# EAGLE board wara (EAGLE 7.5.0)
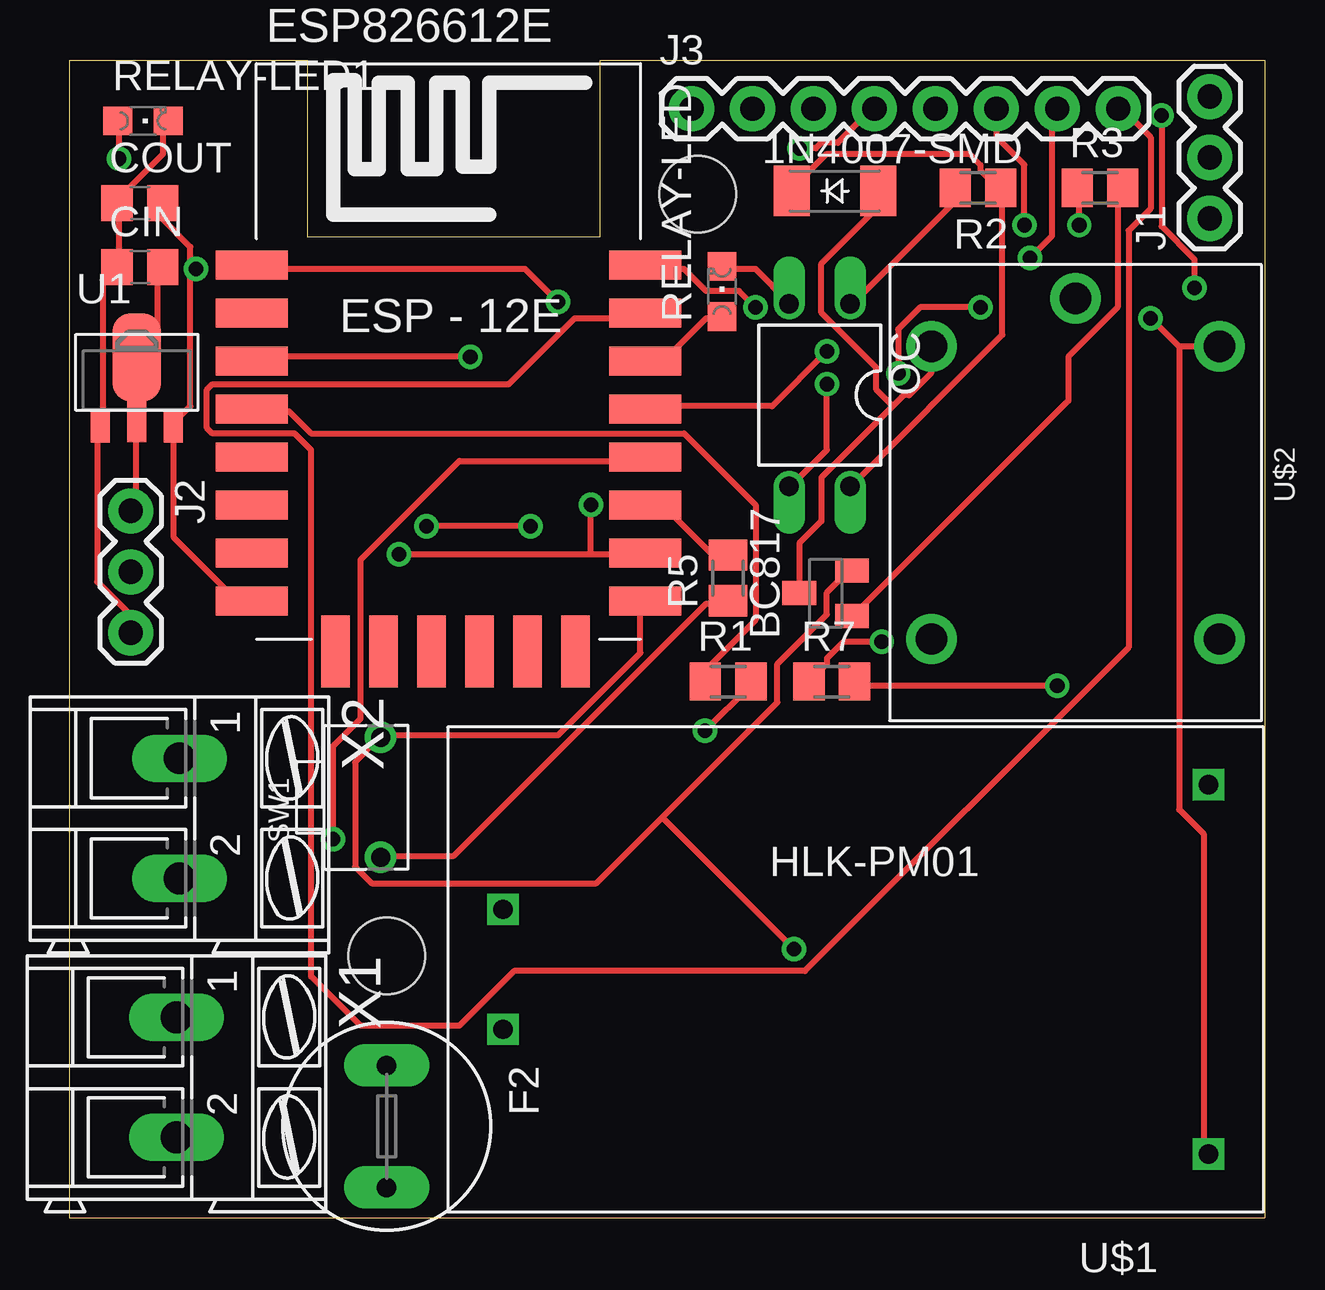
[diagram p0: board, top side]
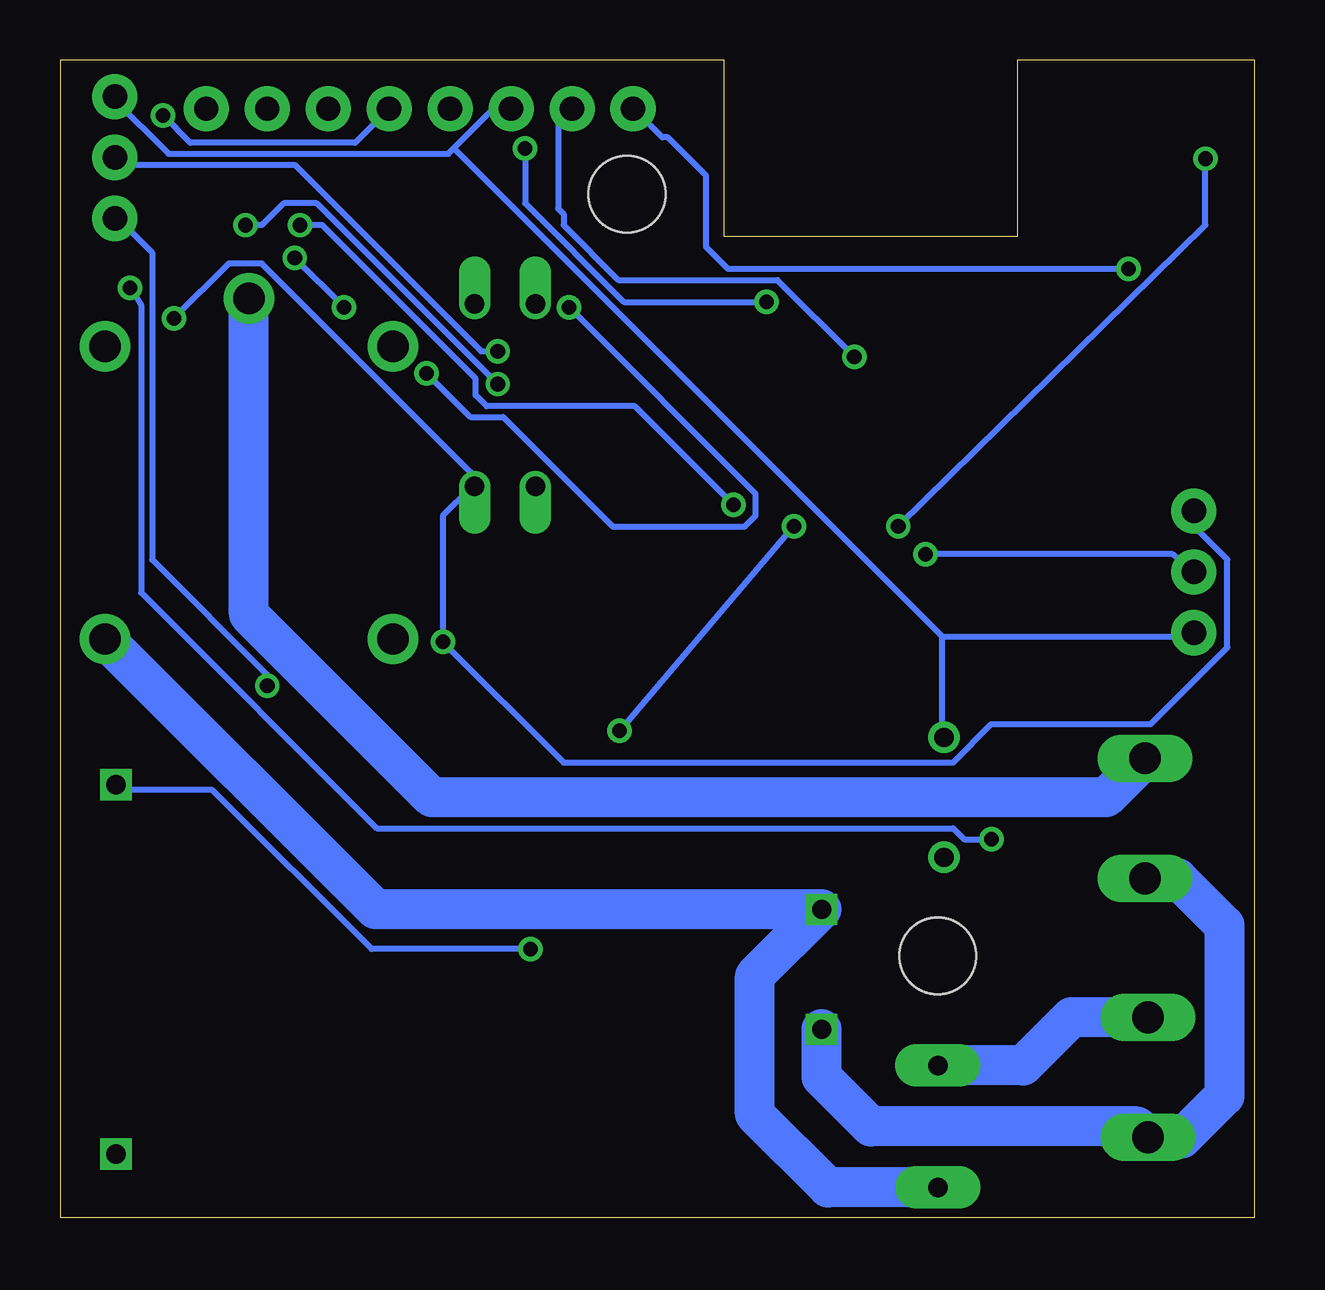
[diagram p1: board, bottom side, seen from below]

Size 49.78 x 48.26 mm. Coordinates in mm from the lower left corner, seen from the top.
Outline: 0,0 49.78,0 49.78,48.26 22.1,48.26 22.1,40.89 9.91,40.89 9.91,48.26 0,48.26 0,0
Copper layers (1*16): Top 0.035mm / dielectric 1.5mm / Bottom 0.035mm
Design rules "default": minimum track width 10mil, minimum drill 24mil, track to track 8mil, track to pad 8mil, pad to pad 8mil, via to via 8mil, smd to smd 8mil, copper to edge 40mil, drill to drill 8mil, minimum pad ring 10mil, minimum via ring 8mil, stop-mask expansion 4mil, vias tented up to drill 0mil, thermal gap 10mil
Holes 3.2 mm at 13.21,10.92 26.16,42.67

## Footprints (pad centres in the part's own frame; a part is rotated, then mirrored left to right if it is on the bottom)
SOD-123_MINI-SMA = smd 1.5 x 2.1: A 1.8,0; C -1.8,0
SOT23-BEC = smd 1 x 1.4: B -0.95,-1.1; C 0,1.1; E 0.95,-1.1
C0805 = smd 1.3 x 1.5: 1 -0.95,0; 2 0.95,0
ESP12E-SMD = smd 3 x 1.2: ADC -8.3,3.8; CH_PD -8.3,1.8; GND 8.1,-8.2; GPIO0 8.1,-2.2; GPIO2 8.1,-4.2; GPIO4 8.1,-0.2; GPIO5 8.1,1.8; GPIO12 -8.3,-4.2; GPIO13 -8.3,-6.2; GPIO14 -8.3,-2.2; GPIO15 8.1,-6.2; GPIO16 -8.3,-0.2; RESET -8.3,5.8; RXD0 8.1,3.8; TXD0 8.1,5.8; VCC -8.3,-8.2 | smd 1.2 x 3: CS0 -4.8,-10.3; GPIO9 -0.8,-10.3; GPIO10 1.2,-10.3; MISO -2.8,-10.3; MOSI 3.2,-10.3; SCLK 5.2,-10.3
TR5 = drill 0.813 pad 1.778 long: 1 -2.54,0; 2 2.54,0
1X03 = drill 1.016 pad 1.88: 1 0,0; 2 2.54,0; 3 5.08,0
1X08_ROUND = drill 1.016 pad 1.88: 1 0,0; 2 2.54,0; 3 5.08,0; 4 7.62,0; 5 10.16,0; 6 12.7,0; 7 15.24,0; 8 17.78,0
DIL04 = drill 0.813 offset: 1 -1.27,-3.81; 2 1.27,-3.81; 3 1.27,3.81; 4 -1.27,3.81
M0805 = smd 1.3 x 1.6: 1 -0.95,0; 2 0.95,0
CHIPLED_0805 = smd 1.2 x 1.2: A 0,-1.05; C 0,1.05
SW2-5.0-6.0X3.0X4.3MM = drill 0.8 pad 1.27: 1 -2.5,0; 2 2.5,0
SOT89 = smd 0.8 x 1.4: 1 -1.524,-1.905; 3 1.524,-1.905 | smd 0.8 x 1.9: 2 0,-1.651 | smd 2.032 x 3.65: 4 0,0.94
HLK-PM01 = drill 0.8 square: +5V 15.19,-7.76; AC1 -14.21,2.44; AC2 -14.21,-2.56; GND 15.19,7.64
RELAY-SONGLE = drill 1.3 pad 2.1: COM -8.1,0; NC 6.1,6; NO 6.1,-6; V+ -6.1,6; V- -6.1,-6
AK300/2 = drill 1.321 long: 1 -2.515,0; 2 2.489,0

## Placement (x,y rotation side)
1N4007-SMD  CGRM4007-G  [SOD-123_MINI-SMA]  31.88,42.8 0 top
BC817  SOT23  [SOT23-BEC]  31.5,26.04 90 top
CIN  1uF  [C0805]  2.92,39.62 0 top
COUT  1uF  [C0805]  2.92,42.29 0 top
ESP826612E  Value  [ESP12E-SMD]  15.88,33.91 0 top
F2  [TR5]  13.21,3.81 270 top
J1  [1X03]  47.5,41.66 90 top
J2  [1X03]  2.54,29.46 270 top
J3  [1X08_ROUND]  25.91,46.23 0 top
OC  PC817  [DIL04]  31.24,34.29 180 top
R1  230  [M0805]  27.43,22.35 0 top
R2  1k  [M0805]  37.85,42.93 180 top
R3  470  [M0805]  42.93,42.93 0 top
R5  470  [M0805]  27.43,26.67 90 top
R7  230  [M0805]  31.75,22.35 0 top
RELAY-LED  [CHIPLED_0805]  27.18,38.61 0 top
RELAY-LED1  ESP-LED  [CHIPLED_0805]  3.05,45.72 270 top
SW1  [SW2-5.0-6.0X3.0X4.3MM]  12.95,17.53 90 top
U1  XC6206PR  [SOT89]  2.79,34.92 0 top
U$1  HLK-PM01  [HLK-PM01]  32.26,10.41 0 top
U$2  RELAY-SONGLE  [RELAY-SONGLE]  41.91,30.23 270 top
X1  220V  [AK300/2]  4.45,5.84 270 top
X2  Plug  [AK300/2]  4.57,16.64 270 top

## Library data of the parts
1N4007-SMD = diode
BC817 = transistor-neu-to92
CIN COUT R1-R3 R5 R7 = rcl
ESP826612E = esp8266modules
F2 = fuse; OC_FARNELL: unknown; OC_NEWARK: unknown
J1 J2 = SparkFun-Connectors
J3 = SparkFun-Connectors; PROD_ID: CONN-08437
OC = optocoupler; MPN: PC817X4J000F; OC_FARNELL: 9707727; OC_NEWARK: 97K7059
RELAY-LED RELAY-LED1 = led
SW1 = Seeed-OPL-Switch
U1 = IC
U$1 = HLK-PM01
U$2 = Seeed-OPL-Relay
X1 X2 = con-ptr500; OC_FARNELL: unknown; OC_NEWARK: unknown

## Nets
+5V: 1N4007-SMD.C CIN.2 J2.1 OC.4 R2.1 R7.1 U1.2 U1.4 U$1.+5V U$2.V+
EN: ESP826612E.CH_PD J3.2
GND: BC817.E CIN.1 COUT.1 ESP826612E.GND J1.3 J2.3 J3.3 RELAY-LED1.C SW1.2 U1.1 U$1.GND
GPIO0: ESP826612E.GPIO0 J3.5
GPIO2: ESP826612E.GPIO2 R5.2
GPIO4: ESP826612E.GPIO4 J1.2
GPIO5: ESP826612E.GPIO5 RELAY-LED.A
GPIO12: ESP826612E.GPIO12
GPIO13: ESP826612E.GPIO13
GPIO14: ESP826612E.GPIO14
GPIO15: ESP826612E.GPIO15 J2.2 J3.6
GPIO16: ESP826612E.GPIO16 R1.1
N$1: F2.2 U$1.AC1 U$2.NC
N$2: OC.3 R3.1
N$3: U$1.AC2 X1.2 X2.2
N$4: U$2.COM X2.1
N$5: BC817.B R3.2
N$6: OC.2 RELAY-LED.C
N$7: R5.1 SW1.1
N$8: R1.2 RELAY-LED1.A
N$9: J1.1 R7.2
N$10: F2.1 X1.1
N$13: OC.1 R2.2
N$18: 1N4007-SMD.A BC817.C U$2.V-
RST: ESP826612E.RESET J3.4
RX: ESP826612E.RXD0 J3.8
TX: ESP826612E.TXD0 J3.7
V33: COUT.2 ESP826612E.VCC J3.1 U1.3

## Tracks (layer width: path | path; a pad name or v marks a point on that pad's centre or on a via)
+5V  (via drill 0.61)
  Top 0.254: 46.23,36.32 46.23,17.02 47.24,16 47.24,2.79 U$1.+5V | 46.23,36.32 47.75,36.32 U$2.V+ | CIN.2 3.66,39.55 3.66,36.58 2.97,35.89 U1.4 2.74,35.66 2.74,33.38 U1.2 2.74,33.15 2.74,29.49 J2.1 | 1N4007-SMD.C 30.18,42.98 31.55,44.35 37.49,44.35 37.95,43.89 37.95,43.66 38.63,42.98 R2.1 38.86,42.75 38.86,36.8 32.69,30.63 OC.4 | v33.83,24 32.23,24 31.55,23.32 31.55,23.09 30.86,22.4 R7.1 | v45.03,37.49 46.23,36.32
  Bottom 0.254: J2.1 2.52,29.26 2.52,28.8 1.14,27.43 1.14,23.77 4.34,20.57 10.97,20.57 12.57,18.97 28.8,18.97 v33.83,24 33.83,29.26 32.69,30.4 OC.4 32.69,30.63 32.69,31.09 41.38,39.78 42.75,39.78 v45.03,37.49
EN  (via drill 0.61)
  Top 0.254: v16.69,35.89 7.77,35.89 ESP826612E.CH_PD
  Bottom 0.254: v16.69,35.89 19.89,39.09 26.52,39.09 28.8,41.38 28.8,41.83 29.03,42.06 29.03,45.72 28.57,46.18 J3.2
GND  (via drill 0.61)
  Top 0.254: RELAY-LED1.C 3.89,45.72 3.89,44.35 1.83,42.29 COUT.1 2.06,42.29 2.06,39.78 CIN.1 1.83,39.55 1.37,39.09 1.37,33.15 U1.1 1.14,32.92 1.14,26.52 2.52,25.15 2.52,24.46 J2.3 | 24.69,16.69 21.95,13.95 12.57,13.95 11.89,14.63 11.89,18.97 12.8,19.89 SW1.2 13.03,20.12 20.34,20.12 23.77,23.55 23.77,25.6 ESP826612E.GND | 24.69,16.69 29.49,21.49 29.49,23.09 31.55,25.15 31.55,26.06 32.46,26.98 BC817.E | 24.69,16.69 v30.18,11.2
  Bottom 0.254: 33.38,44.58 33.6,44.35 45.26,44.35 47.55,46.63 J1.3 | 33.38,44.58 31.77,46.18 31.09,46.18 J3.3 | v30.18,11.2 36.8,11.2 43.43,17.83 47.32,17.83 U$1.GND | 13.03,24.23 33.38,44.58 | 13.03,24.23 13.03,20.12 SW1.2 | 13.03,24.23 2.74,24.23 J2.3
GPIO0  (via drill 0.61)
  Top 0.254: v10.97,15.77 10.97,19.66 12.12,20.8 12.12,27.43 16.23,31.55 23.77,31.55 ESP826612E.GPIO0 | v46.86,38.76 46.86,39.95 45.49,41.33 v45.49,45.95
  Bottom 0.254: v10.97,15.77 12.12,15.77 12.57,16.23 36.58,16.23 46.41,26.06 46.41,38.05 v46.86,38.76 | v45.49,45.95 44.35,44.81 37.49,44.81 J3.5
GPIO2
  Top 0.254: R5.2 27.43,27.66 26.75,27.66 24.92,29.49 24,29.49 ESP826612E.GPIO2
GPIO4  (via drill 0.61)
  Top 0.254: v31.55,36.12 29.26,33.83 24,33.83 ESP826612E.GPIO4
  Bottom 0.254: v31.55,36.12 32.23,36.12 40.01,43.89 47.09,43.89 47.32,44.12 J1.2
GPIO5
  Top 0.254: RELAY-LED.A 26.98,37.49 26.52,37.49 24.92,35.89 24,35.89 ESP826612E.GPIO5
GPIO15  (via drill 0.61)
  Top 0.254: v13.72,27.66 21.72,27.66 | 21.72,27.66 23.77,27.66 ESP826612E.GPIO15 | v39.78,41.38 39.78,43.89 38.63,45.03 38.63,46.18 J3.6 | 21.72,27.66 v21.72,29.72
  Bottom 0.254: v13.72,27.66 3.43,27.66 2.74,26.98 J2.2 | v39.78,41.38 38.86,41.38 32.46,34.98 32.46,34.29 32,33.83 25.83,33.83 v21.72,29.72
GPIO16
  Top 0.254: R1.1 26.52,22.4 26.52,22.86 28.57,24.92 28.57,29.72 25.6,32.69 10.06,32.69 9.14,33.6 7.77,33.6 ESP826612E.GPIO16
N$1
  Bottom 1.676: F2.2 17.78,1.27 20.83,4.32 20.83,10.07 U$1.AC1 36.64,12.85 U$2.NC
N$2  (via drill 0.61)
  Top 0.254: v42.06,41.38 42.06,42.75 R3.1 | v31.55,34.75 31.55,32 30.18,30.63 OC.3
  Bottom 0.254: v42.06,41.38 41.38,41.38 40.46,42.29 39.09,42.29 v31.55,34.75
N$3
  Bottom 1.676: X2.2 3.23,14.15 1.27,12.19 1.27,5.08 3.05,3.3 4.39,3.3 X1.2 4.9,3.81 16,3.81 18.05,5.86 U$1.AC2
N$4
  Bottom 1.676: X2.1 6.2,17.53 34.29,17.53 41.91,25.15 U$2.COM
N$5
  Top 0.254: BC817.B 32.69,25.15 41.6,34.06 41.6,35.89 43.66,37.95 43.66,42.75 R3.2
N$6
  Top 0.254: RELAY-LED.C 27.2,39.55 28.57,39.55 29.95,38.18 OC.2
N$7
  Top 0.254: R5.1 27.43,25.6 26.52,25.6 16,15.09 13.03,15.09 SW1.1
N$8  (via drill 0.61)
  Top 0.254: v2.06,44.15 2.06,45.72 RELAY-LED1.A | v19.2,28.83 v14.86,28.83 | v26.47,20.3 28.35,22.17 R1.2
  Bottom 0.254: v2.06,44.15 2.06,41.38 v14.86,28.83 | v26.47,20.3 v19.2,28.83
N$9  (via drill 0.61)
  Top 0.254: v41.15,22.17 32.92,22.17 R7.2
  Bottom 0.254: v41.15,22.17 41.15,22.63 45.95,27.43 45.95,40.23 47.32,41.6 J1.1
N$10
  Bottom 1.676: X1.1 7.64,8.36 9.65,6.35 F2.1
N$13
  Top 0.254: R2.2 36.8,42.75 36.8,42.29 32.69,38.18 OC.1
N$18
  Top 0.254: 34.29,33.83 34.75,34.29 34.98,34.29 35.89,35.2 35.89,36.12 U$2.V- | 34.29,33.83 31.32,30.86 31.32,29.03 30.4,28.12 30.4,26.06 BC817.C | 34.29,33.83 33.6,34.52 33.6,35.43 31.32,37.72 31.32,39.78 33.6,42.06 33.6,42.75 1N4007-SMD.A
RST  (via drill 0.61)
  Top 0.254: v20.34,38.18 18.97,39.55 7.77,39.55 ESP826612E.RESET | v30.4,44.58 31.09,44.58 31.32,44.81 32,44.81 33.38,46.18 J3.4
  Bottom 0.254: v20.34,38.18 26.29,38.18 30.4,42.29 v30.4,44.58
RX
  Top 0.254: ESP826612E.RXD0 23.77,37.49 21.03,37.49 18.29,34.75 5.94,34.75 5.71,34.52 5.71,32.92 5.94,32.69 9.37,32.69 10.06,32 10.06,10.06 12.12,8 16.23,8 18.52,10.29 30.63,10.29 44.12,23.77 44.12,41.15 45.03,42.06 45.03,45.03 43.89,46.18 J3.8
TX  (via drill 0.61)
  Top 0.254: v28.57,37.95 27.89,38.63 26.52,38.63 25.6,39.55 24,39.55 ESP826612E.TXD0 | v34.52,35.2 34.52,37.03 35.43,37.95 v37.95,37.95 | v40.01,40.01 40.92,40.92 40.92,45.95 41.15,46.18 J3.7
  Bottom 0.254: v28.57,37.95 20.8,30.18 20.8,29.26 21.26,28.8 26.75,28.8 31.32,33.38 32.69,33.38 v34.52,35.2 | v40.01,40.01 v37.95,37.95
V33  (via drill 0.61)
  Top 0.254: ESP826612E.VCC 7.54,25.83 6.86,25.83 4.34,28.35 4.34,32.92 U1.3 4.34,33.15 5.03,33.83 5.03,39.55 | 5.03,39.55 5.03,40.46 3.89,41.6 3.89,42.29 COUT.2 | 5.03,39.55 v5.26,39.55
  Bottom 0.254: v5.26,39.55 21.95,39.55 22.86,40.46 22.86,43.43 24.46,45.03 24.69,45.03 25.83,46.18 J3.1